# EAGLE board panelCEM3310 VADSR (EAGLE 9.6.2)
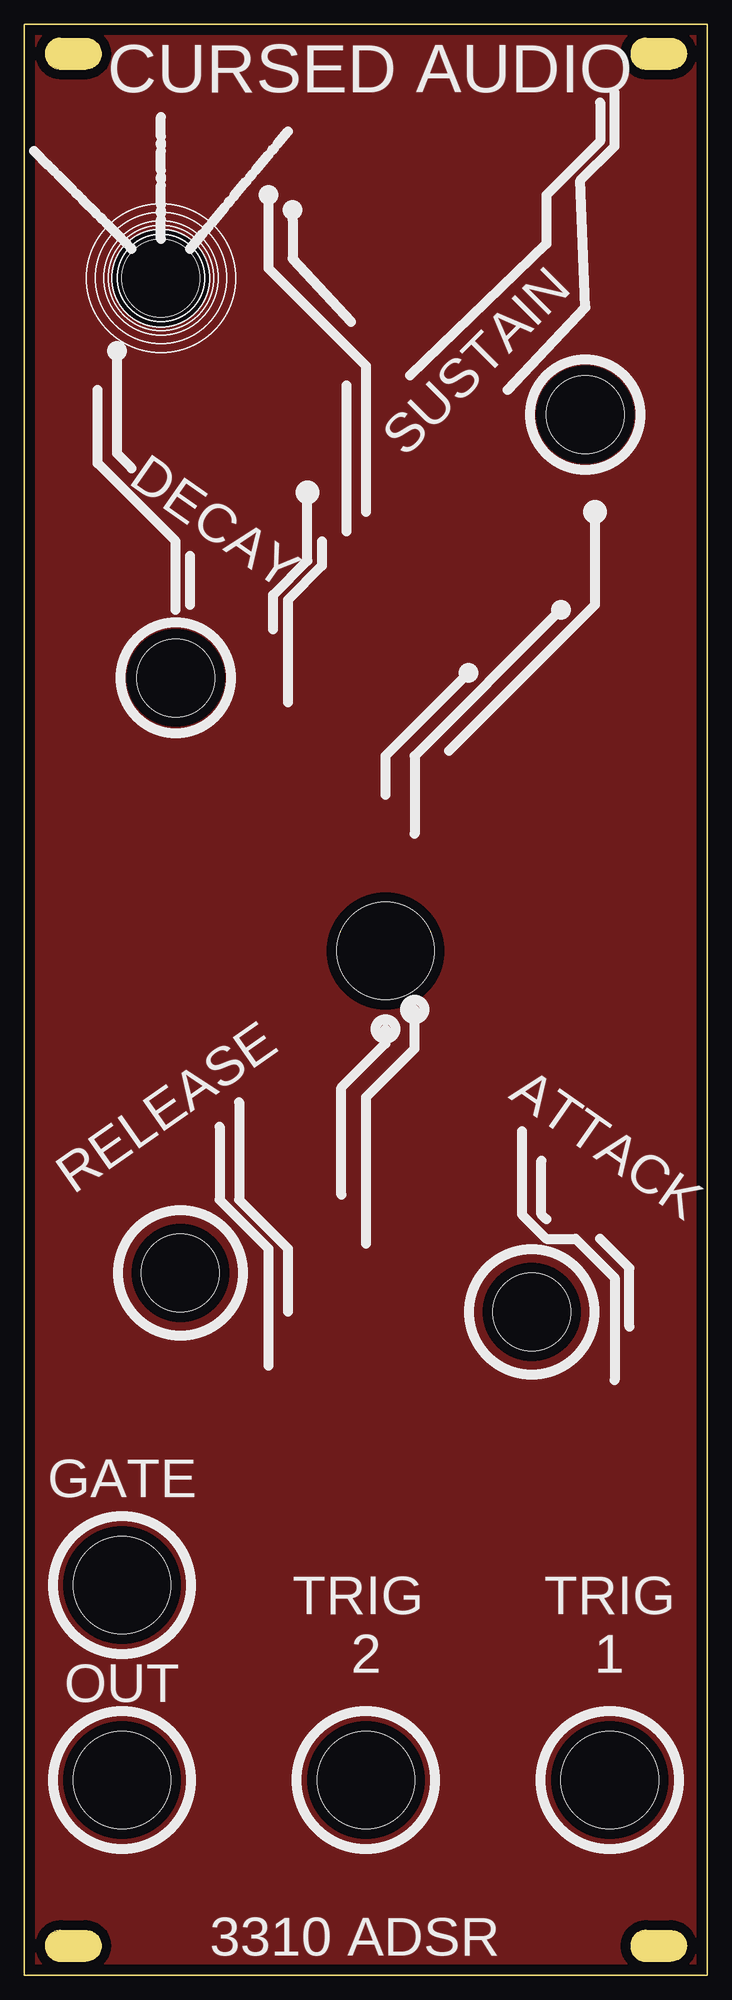
[diagram p0: board, top side]
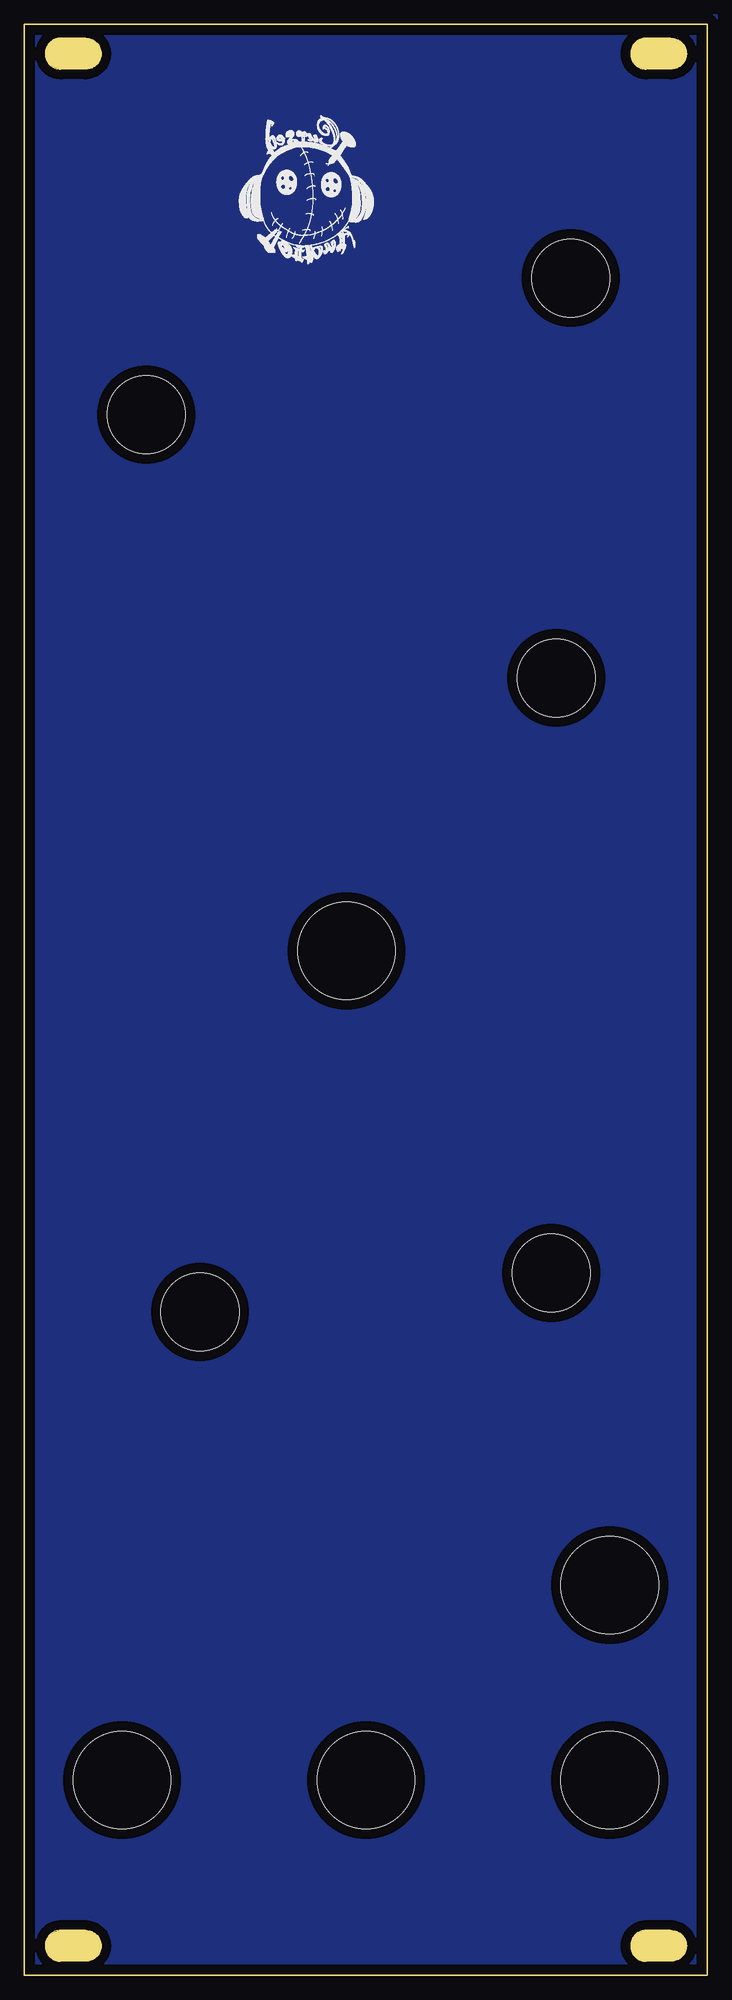
[diagram p1: board, bottom side, seen from below]

Size 70 x 200 mm. Coordinates in mm from the lower left corner, seen from the top.
Outline: 0,200 0,0 70,0 70,200 0,200
Copper layers (1*16): Top 0.035mm / dielectric 1.5mm / Bottom 0.035mm
Design rules "default": minimum track width 6mil, minimum drill 0.35mm, track to track 6mil, track to pad 6mil, pad to pad 6mil, via to via 6mil, smd to smd 6mil, copper to edge 40mil, drill to drill 6mil, minimum pad ring 10mil, minimum via ring 8mil, stop-mask expansion 4mil, vias tented up to drill 0mil, thermal gap 10mil
Holes 8 mm at 16,72 52,68 57.5,160 15.5,133 14,174
Holes 10 mm at 10,20 35,20 60,20 10,40 37,105

## Placement (x,y rotation side)
U$1  [SLOT_HOLE]  5,3 0 top
U$2  [SLOT_HOLE]  65,3 0 top
U$3  [SLOT_HOLE]  5,197 0 top
U$4  [SLOT_HOLE]  65,197 0 top
U$5  [CA]  45.32,180.33 0 top

## Library data of the parts
U$1-U$4 = MusicThingModular
U$5 = logobottom

## Tracks (layer width: path | path; a pad name or v marks a point on that pad's centre or on a via)
GND
  pour Top: 1,200 1,1 0,0 68,0 69,-1 69,199 70,200
  pour Bottom: -1,200 -1,1 0,0 70,0 70,201 -1,201

## Text on the board
tPlace: CURSED AUDIO | SUSTAIN | DECAY | ATTACK | RELEASE | GATE | TRIG / 2 | TRIG / 1 | OUT | 3310 ADSR